# Altium PCB PCB1.PcbDoc (part 2 of 2)
Units mil, origin at the board's own origin, x right, y up, seen from the top; angles counter-clockwise.
Board outline 3937.01 x 3582.68 mil, 2 copper layers (Top Layer, Bottom Layer); 143 components, 102 nets, 475 pads, 464 vias.
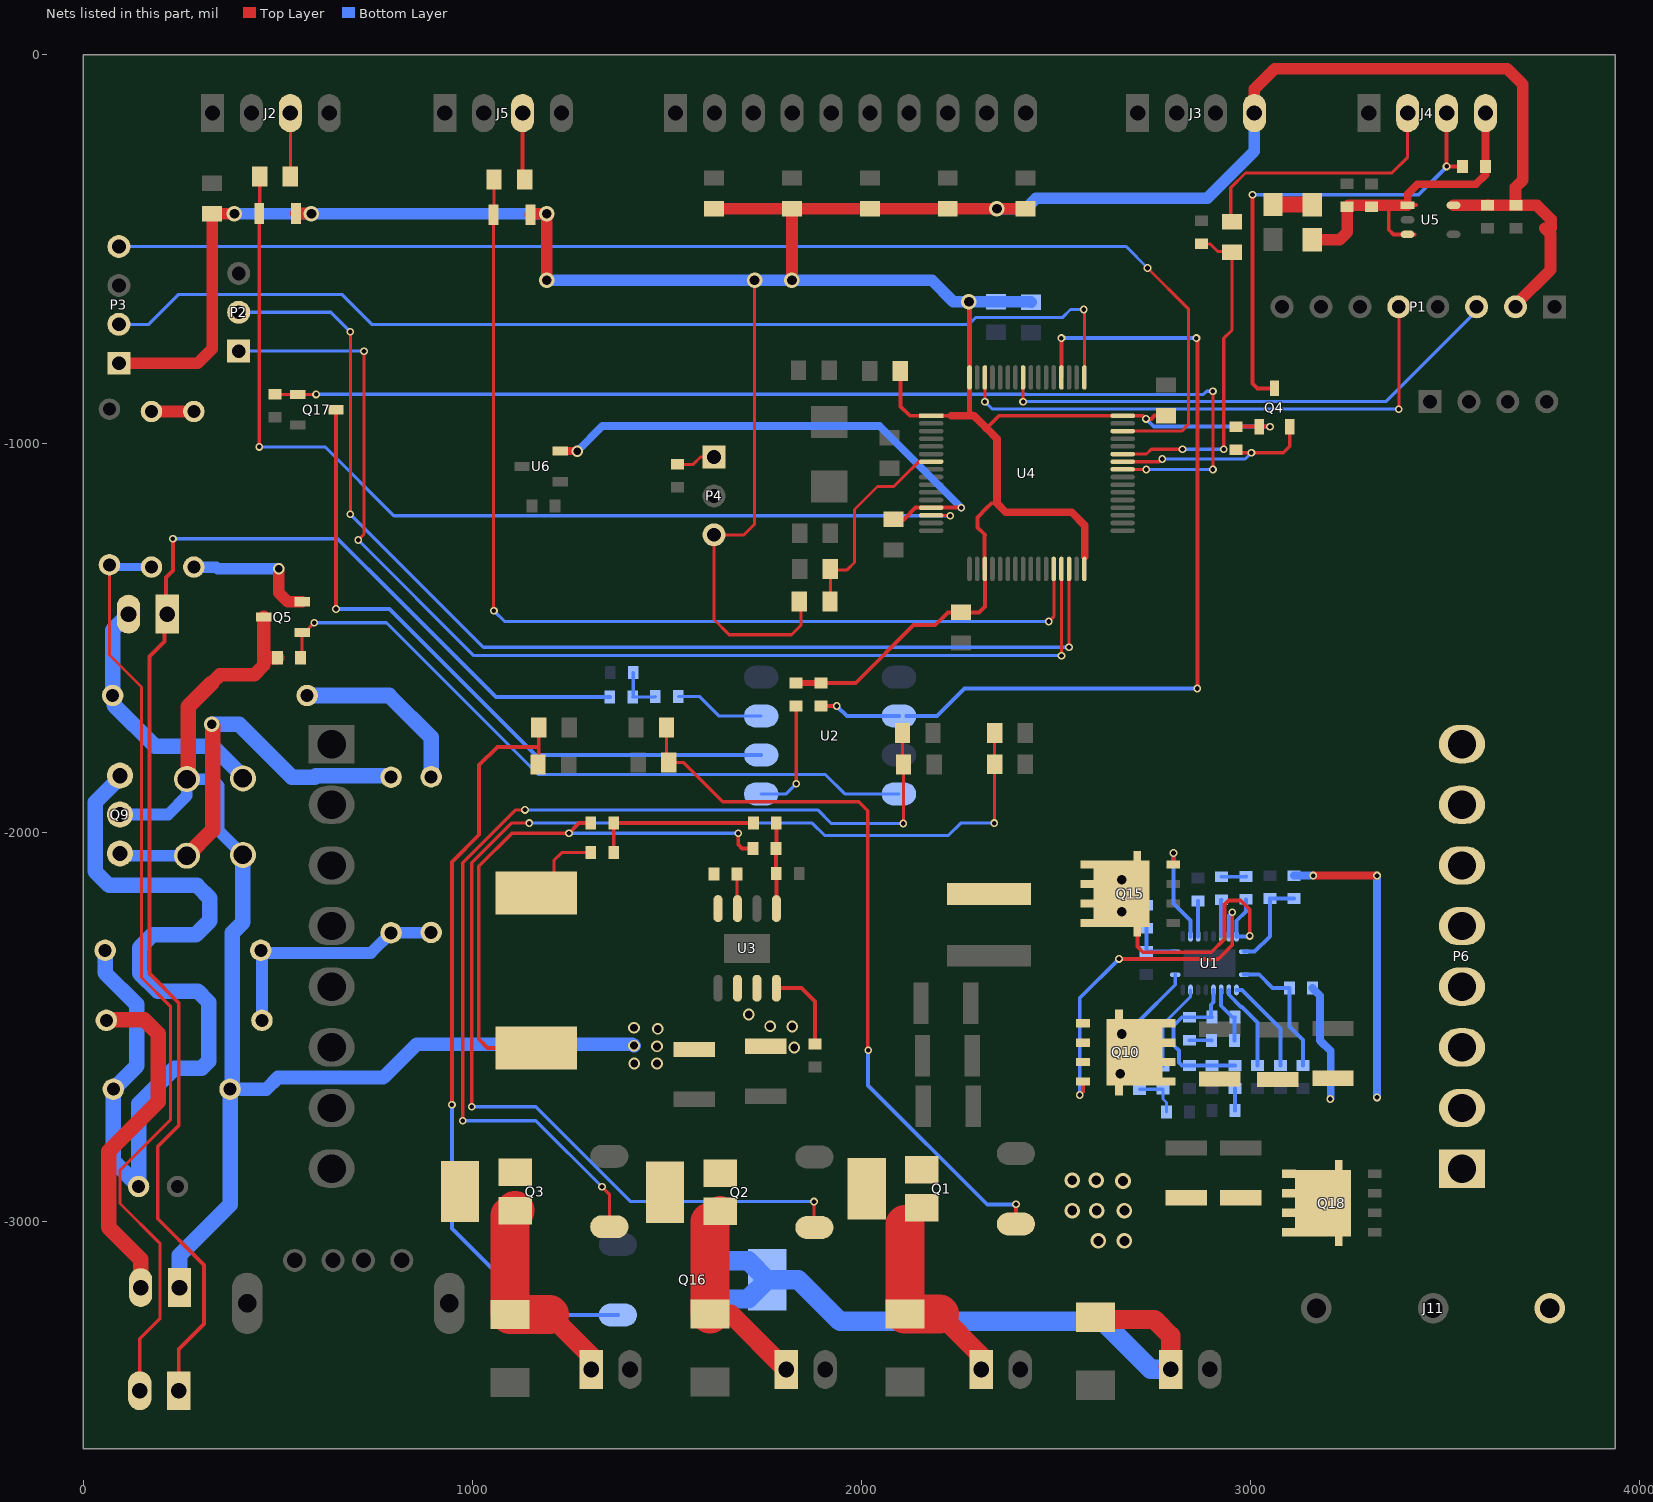
[diagram p2: the nets of this part, all layers, seen from the top]

## Via types
v1: diameter 20, hole 12, Top Layer to Bottom Layer, tented both sides, 399 vias
v2: diameter 40, hole 25, Top Layer to Bottom Layer, tented both sides, 46 vias
v3: diameter 30, hole 20, Top Layer to Bottom Layer, tented both sides, 18 vias
v4: diameter 59.06, hole 39.37, Top Layer to Bottom Layer, 1 vias

## Nets (pads, with @x,y where several pads share a name; then routed paths per layer and width w, separated by ;. In a path a pad name is that pad's centre, name@x,y a point inside that pad or via, vN(x,y) a via of type N, cw(c..) or ccw(c..) an arc to the next point about the centre after c; other vN are vias at no path point) (continued)
NetC3_2: C3.2 R15.2 U4.7 | length 538.3
  Top Layer w8: R15.2@1918.74,-1405 1919.74,-1404 C3.2@1919.74,-1322 1921.74,-1324 1963,-1324 1982,-1305 1982,-1169 2041,-1110 2083,-1110 2106.59,-1086.41 2146.89,-1046.11 U4.7@2179,-1046.11
NetC4_2: C4.2 U4.13 U6.2 | length 1330.8
  Top Layer w10: C4.2@2082,-1194.26 2108.74,-1194.26 2138.78,-1164.22 U4.13@2179,-1164.22 v1(2256,-1164.22)
  Top Layer w20: U6.2@1225.68,-1018.91 1268.91,-1018.91 v3(1269,-1019)
  Bottom Layer w20: v3(1269,-1019) 1334,-954 2045.78,-954 v1(2256,-1164.22)
NetC14_1: C14.1 C32.1 U1.4 | length 148.7
  Bottom Layer w10: U1.4@2924.3,-2403.9 2924.3,-2444.53 2953.77,-2474 C32.1@2959.77,-2474 2958.77,-2475 C14.1@2958.77,-2534
NetC14_2: C14.2 R29.2 | length 57.3
  Bottom Layer w10: R29.2@2842.77,-2533.06 2898.77,-2533.06 C14.2@2899.72,-2534
NetC16_1: C16.1 HUMID3.2 L2.2 | length 662.7
  Bottom Layer w40: L2.2@75,-1647 75,-1478.77 HUMID3.2@115.77,-1438 ; L2.2@78.84,-1647 78.84,-1672.07 183.77,-1777 331.77,-1777 409.77,-1855 C16.1@409.77,-1860
NetC17_1: C17.1 C46.2 L4.1 Q9.3 | length 2417.8
  Bottom Layer w30: Q9.3@93.77,-1858.23 Q9.3@93.77,-1853
  Bottom Layer w40: C46.2@55.77,-2302 55.77,-2360 136.77,-2441 136.77,-2599 C17.1@76.77,-2659 76.77,-2844 L4.1@141.77,-2909 141.77,-2697 233.77,-2605 303.77,-2605 321.77,-2587 321.77,-2435.13 293.64,-2407 190.77,-2407 144.77,-2361 144.77,-2295 177.77,-2262 288.77,-2262 324.77,-2226 324.77,-2168 291.77,-2135 66,-2135 30,-2099 30,-1922 Q9.3@93.77,-1858.23
NetC18_1: C18.1 U1.3 | length 226.3
  Bottom Layer w10: U1.3@2943.98,-2403.9 2943.98,-2416.21 2975.04,-2447.27 2977.69,-2447.27 3018.02,-2487.6 C18.1@3018.02,-2597.94
NetC23_1: C23.1 C46.1 R60.1 R61.1 | length 655.2
  Top Layer w30: C46.1@455.77,-2302 C46.1@462.69,-2308.91 ; R61.1@790.77,-2257 R61.1@791.77,-2256
  Bottom Layer w30: C23.1@455.77,-2479 C23.1@458.77,-2482 C46.1@458.77,-2305 ; C46.1@455.77,-2302 C46.1@458.77,-2305 ; R60.1@893.77,-2256 892.77,-2257 R61.1@790.77,-2257 738.86,-2308.91 462.69,-2308.91 C46.1@458.77,-2305
NetC23_2: C23.2 HUMID2.2 | length 888.3
  Top Layer w40: C23.2@58.77,-2482 59.77,-2481 156.77,-2481 192.77,-2517 192.77,-2691 64.77,-2819 64.77,-3014 146.77,-3096 HUMID2.2@146.77,-3169
NetC24_2: C24.2 Q9.1 R61.2 | length 1057.7
  Top Layer w40: C24.2@265.77,-2058.85 331.77,-1992.85 v2@331.77,-1723
  Bottom Layer w30: Q9.1@93.77,-2053 99.62,-2058.85 C24.2@265.77,-2058.85
  Bottom Layer w40: v2(329.77,-1721) 353,-1721 378.77,-1721 400,-1721 536,-1857 593.89,-1857 597.21,-1853.68 787.45,-1853.68 R61.2@790.77,-1857
  other v2: 329.77,-1721
NetC32_2: C32.2 C54.1 R29.1 R45.1 R65.2 U1.5 | length 429.2
  Bottom Layer w10: U1.5@2904.61,-2403.9 2904.61,-2435.16 2897.77,-2442 2897.77,-2471.06 C32.2@2900.72,-2474 R29.1@2842.77,-2474 2823.77,-2474 2801.77,-2496 2801.77,-2546 2815.77,-2560 2815.77,-2590 2823.77,-2598 2842.84,-2598 R45.1@2842.9,-2597.94 R65.2@2901.27,-2597.94 C54.1@2959.65,-2597.94
NetC38_1: C38.1 U3.7 | length 89.1
  Top Layer w8: C38.1@1680,-2106 1680,-2193.64 U3.7@1681,-2194.64
NetC38_2: C38.2 L5.1 R46.2 U3.8 | length 205.9
  Top Layer w8: L5.1@1164,-2155 1209,-2110 1209,-2071 1229,-2051 R46.2@1303.94,-2051
NetC40_1: C40.1 C53.1 R46.1 | length 435
  Top Layer w10: R46.1@1363,-2051 C53.1@1363,-1975 C40.1@1722,-1975
NetC40_2: C40.2 R43.1 R44.2 U3.5 | length 220.4
  Top Layer w10: U3.5@1781,-2194.64 R43.1@1781,-2104 1780.06,-2103.06 R44.2@1780.06,-2040 1781.06,-2039 C40.2@1781.06,-1975
NetC43_1: C43.1 R31.1 | length 63.4
  Bottom Layer w10: R31.1@2924.77,-2113 2986.77,-2113 C43.1@2987.77,-2112
NetC43_2: C43.2 L1.1 Q10.1 Q10.2 Q10.3 Q15.5 Q15.6 Q15.7 Q15.8 R27.1 U1.19 | length 747.4
  Top Layer w10: Q15.8@2708.85,-2235.36 2708.85,-2292.08 2723.77,-2307 2898.77,-2307 2932.77,-2273 2932.77,-2184 2942.77,-2174 2974.77,-2174 2997.77,-2197 v1(2997.77,-2265)
  Bottom Layer w10: v2(2668.5,-2202.83) 2685.33,-2186 R27.1@2732.77,-2186 ; C43.2@2987.77,-2171.06 2987.77,-2202 2963.67,-2226.1 U1.19@2963.67,-2266.1 2996.67,-2266.1 v1(2997.77,-2265)
  other v1: 2997.77,-2265
  other v2: 2668.5,-2120.41
NetC47_2: C47.2 R33.2 U1.20 | length 241.7
  Bottom Layer w10: U1.20@2983.35,-2305.47 3010.3,-2305.47 3049.77,-2266 C47.2@3049.77,-2169.06 R33.2@3111.77,-2169.06
NetC49_2: C49.2 R27.2 U1.11 | length 134.9
  Bottom Layer w10: R27.2@2732.77,-2245.06 2732.77,-2303.94 C49.2@2731.77,-2304.94 2732.3,-2305.47 U1.11@2806.19,-2305.47
NetC54_2: C54.2 R66.2 | length 57.1
  Bottom Layer w10: C54.2@2959.65,-2657 2959.83,-2657.18 R66.2@2959.83,-2714
NetC55_1: C55.1 R64.2 R73.2 | length 122.9
  Bottom Layer w8: R64.2@2714.77,-2659.06 R73.2@2775,-2659.06 2775,-2684 2784,-2693 C55.1@2784,-2718
NetFB1_2: FB1.2 FU2.1 | length 101.4
  Top Layer w40: FB1.2@3057.61,-385 3157.61,-385 FU2.1@3158.61,-386
NetHUMID1_1: HUMID1.1 HUMID3.1 R57.2 | length 3693.1
  Top Layer w10: v1(229.77,-1244) 229.77,-1326 211.77,-1344 211.77,-1434 HUMID3.1@215.77,-1438 208.77,-1445 208.77,-1508 170,-1546.77 170,-2362 245,-2437 245,-2752 191,-2806 191,-2992 300,-3101 ; HUMID1.1@244.77,-3434 244.77,-3328 309.77,-3263 309.77,-3110.77 300,-3101 ; 262,-3063 300,-3101
  Bottom Layer w10: v1(229.77,-1244) 598,-1244 653,-1244 807,-1398 812,-1403 1060,-1651 R57.2@1352.95,-1651
  other v1: 229.77,-1244
NetHUMID1_2: HUMID1.2 R25.2 R26.2 | length 2416.9
  Top Layer w8: R26.2@66.77,-1311 66.77,-1542.77 149,-1625 149,-2372 224,-2447 224,-2737 93.77,-2867.23 93.77,-2952.77 197,-3056 197,-3248 144.77,-3300.23 HUMID1.2@144.77,-3434
  Bottom Layer w8: R26.2@66.77,-1311 R26.2@72.77,-1317
  Bottom Layer w20: R26.2@72.77,-1317 R25.2@174.77,-1317
NetJ2_3: J2.3 R2.1 | length 163
  Top Layer w8: R2.1@531.77,-313 J2.3@531.77,-150
NetJ4_3: J4.3 Q4.3 R16.2 | length 1254.5
  Top Layer w10: v1(3005,-360) 3005,-845 3017.57,-857.57 Q4.3@3061.37,-857.57 ; J4.3@3503.77,-150 v1(3503.77,-287) R16.2@3544.72,-287
  Bottom Layer w10: v1(3005,-360) 3431.77,-360 v1@3504.77,-287
NetJ5_3: J5.3 R4.1 | length 173.2
  Top Layer w10: J5.3@1128.77,-150 1128.77,-315.77 R4.1@1134,-321
NetL2_1: L2.1 R60.2 | length 464.5
  Bottom Layer w40: L2.1@575,-1647 785.77,-1647 893.77,-1755 R60.2@893.77,-1856
NetP4_1: P4.1 R17.2 | length 102.9
  Top Layer w8: R17.2@1526.77,-1052.94 1567.05,-1052.94 1585.99,-1034 P4.1@1620.77,-1034 P4.1@1620.03,-1033.26
NetQ1_1: Q1.1 R1.2 R3.2 | length 1919.8
  Top Layer w8: R3.2@1498.74,-1834.74 R3.2@1499,-1835 ; R1.2@1498.74,-1729 1498.74,-1815 1501,-1817.26 R3.2@1501,-1819 ; R3.2@1504.74,-1819 1542,-1819 1643,-1920 1993,-1920 2016,-1943 2016,-2053
  Top Layer w10: 2016,-2053 2016,-2558 v1(2017,-2559) ; Q1.1@2396.83,-3005.55 v1@2396.83,-2955.06
  Bottom Layer w10: v1(2396.77,-2955) 2323,-2955 2017,-2649 v1@2017,-2560 ; v1@2017,-2560 v1(2017,-2559) 2016,-2559 v1@2017,-2560
NetQ2_1: Q2.1 R5.2 R6.2 | length 3318.9
  Top Layer w8: v1(998,-2704) 998,-2077 1100,-1975 v1(1146,-1975) ; v1(1877.77,-2948) 1877.77,-3013.49 Q2.1@1878.83,-3014.55 ; v1@2342.03,-1973.97 R6.2@2342.03,-1823.74 ; R6.2@2342.03,-1823 R6.2@2342.03,-1823.74 ; R5.2@2342.03,-1743 2342.03,-1822.26 2341.29,-1823 R6.2@2342.03,-1823.74
  Bottom Layer w8: v1(998,-2704) 1162.77,-2704 1406.77,-2948 v1(1877.77,-2948) ; v1(1146,-1975) 1873,-1975 1905,-2007 2223,-2007 2255,-1975 v1(2341,-1975)
NetQ3_1: Q3.1 R10.2 R11.2 | length 2755.4
  Top Layer w8: v1(975,-2740) 975,-2077 1111,-1941 v1(1135,-1941) ; v1(1332.77,-2910) 1351.83,-2929.06 Q3.1@1351.83,-3012.55 ; R10.2@2105.03,-1743 2105.03,-1821.74 R11.2@2108.03,-1824.74 ; v1(2107,-1976) 2108.03,-1974.97 R11.2@2108.03,-1824.74 ; 2108.03,-1940.97 R11.2@2108.03,-1824.74
  Bottom Layer w8: v1(975,-2740) 1162.77,-2740 v1(1332.77,-2910) ; v1(1135,-1941) 1887,-1941 1922,-1976 v1(2107,-1976)
NetQ5_1: Q5.1 R63.1 U2.8 | length 1793.4
  Top Layer w8: R63.1@558,-1550 562,-1546 Q5.1@562,-1485 568,-1485 v1(593,-1460)
  Bottom Layer w8: v1(593,-1460) 779,-1460 1151,-1832 1169,-1850 1907,-1850 1957,-1900 U2.8@2096.17,-1900
NetQ5_2: Q5.2 R24.2 | length 357.2
  Top Layer w30: v3(502.03,-1321.03) 502.03,-1383 525.29,-1406.26 Q5.2@562,-1406.26
  Bottom Layer w30: R24.2@287.77,-1321 R24.2@283.77,-1317 341,-1317 345.03,-1321.03 v3(502.03,-1321.03)
NetQ10_4: Q10.4 U1.18 | length 873.2
  Top Layer w10: v1(2560.77,-2674) 2569.17,-2665.6 Q10.4@2569.17,-2639.38 ; v1(2661.77,-2324) 2916.77,-2324 2952.77,-2288 v1(2952.77,-2204)
  Bottom Layer w10: v1(2560.77,-2674) 2560.77,-2425 v1(2661.77,-2324) ; U1.18@2943.98,-2266.1 2943.98,-2212.79
  other v1: 2560.77,-2674 2661.77,-2324 2952.77,-2204
NetQ15_4: Q15.4 U1.13 | length 262
  Top Layer w10: Q15.4@2801.37,-2081.62 2801.77,-2081.22 v1(2801.77,-2052)
  Bottom Layer w10: v1(2801.77,-2052) 2801.77,-2182 2845.56,-2225.79 U1.13@2845.56,-2266.1
  other v1: 2801.77,-2052
NetQ16_1: Q16.1 R52.2 R53.2 | length 2006.4
  Top Layer w10: v1(947,-2699) 947,-2075 1017,-2005 1017,-1826 1064,-1779 1169.03,-1779 ; R53.2@1168.26,-1824 1170.26,-1822 R52.2@1170.26,-1729
  Bottom Layer w10: v1(947,-2699) 947,-3017.23 1169.32,-3239.55 Q16.1@1373.71,-3239.55
NetQ17_3: Q17.3 U2.2 | length 1761.4
  Top Layer w10: Q17.3@648.77,-911.94 Q17.3@649.2,-912.37 v1(649.2,-1424.8) v1@649,-1425
  Bottom Layer w10: v1(649.2,-1424.8) 786.8,-1424.8 1162,-1800 U2.2@1741.83,-1800
NetR23_1: R23.1 U2.1 | length 300.9
  Top Layer w8: v1(1832,-1874) R23.1@1832,-1673.99
  Bottom Layer w8: U2.1@1741.83,-1900 1806,-1900 v1(1832,-1874)
NetR24_1: R24.1 R25.1 | length 109
  Top Layer w30: R25.1@174.77,-917 R24.1@283.77,-917
NetR31_2: R31.2 U1.17 | length 94.2
  Bottom Layer w10: U1.17@2924.3,-2266.1 2924.3,-2172.53 R31.2@2924.77,-2172.06
NetR32_1: R32.1 R68.2 U1.1 | length 344.1
  Bottom Layer w10: U1.1@2983.35,-2364.53 3022.3,-2364.53 3056.77,-2399 R32.1@3099.77,-2399 3099.77,-2498 3134.77,-2533 R68.2@3134.77,-2597.94
NetR47_2: R47.2 U3.4 | length 222.3
  Top Layer w10: U3.4@1781,-2399.36 1845.36,-2399.36 1880,-2434 R47.2@1880,-2542.94
NetR55_2: R55.2 R56.2 U4.43 | length 870.4
  Top Layer w8: U4.43@2671.13,-1026.43 2732.57,-1026.43 2745,-1014 v1(2825,-1014) v1@2826,-1015 ; R55.2@2874,-486.06 2895.71,-486.06 2915.39,-505.74 2950,-505.74 R56.2@2952,-507.74 ; v1(2931,-1014) 2931,-729 2952,-708 R56.2@2952,-507.74 ; R56.2@2950,-507.74 R56.2@2952,-507.74
  Bottom Layer w8: v1(2825,-1014) v1(2931,-1014)
NetR57_1: R57.1 R62.2 R69.2 | length 121.8
  Bottom Layer w8: R62.2@1413.06,-1588 1413.06,-1649.94 R57.1@1412,-1651 1468.95,-1651 R69.2@1469.95,-1650
NetR64_1: R64.1 U1.10 | length 273.3
  Bottom Layer w10: R64.1@2714.77,-2600 2714.77,-2482 2806.19,-2390.58 U1.10@2806.19,-2364.53
NetR67_2: R67.2 U1.2 | length 248.9
  Bottom Layer w10: U1.2@2963.67,-2403.9 2977.67,-2403.9 3076.4,-2502.62 R67.2@3076.4,-2597.94
NetR69_1: R69.1 U2.3 | length 233.5
  Bottom Layer w8: R69.1@1529,-1650 1584,-1650 1634,-1700 U2.3@1741.83,-1700
NetR73_1: R73.1 U1.8 | length 225.3
  Bottom Layer w8: R73.1@2775,-2600 2775,-2492 2845.56,-2421.44 U1.8@2845.56,-2403.9
OUT1: D1.A J1.1 Q1.2 | length 505.1
  Top Layer w50: 2199.87,-3237 2307.77,-3344.91 J1.1@2307.77,-3379.5
  Top Layer w100: 2111.74,-3007.18 D1.A@2111.74,-3237 2199.87,-3237
OUT2: D4.A J6.1 Q2.2 | length 529.8
  Top Layer w50: D4.A@1610.26,-3237 1663.77,-3237 J6.1@1806.27,-3379.5
  Top Layer w80: Q2.2@1610.26,-2999.66 Q2.2@1636.71,-2973.21
  Top Layer w100: D4.A@1610.26,-3237 Q2.2@1610.26,-2999.66
OUT3: D5.A J7.1 Q3.2 | length 559
  Top Layer w50: 1197.87,-3238 1304.77,-3344.91 J7.1@1304.77,-3379.5
  Top Layer w100: Q3.2@1109.71,-2971.21 1096.77,-2984.15 D5.A@1096.77,-3238 1197.87,-3238
OUT4: D6.A J9.1 Q16.2 | length 1769.7
  Top Layer w50: D6.A@2601.77,-3245 2607.77,-3251 2752.77,-3251 2794.77,-3293 J9.1@2794.77,-3379 J9.1@2787.77,-3372
  Bottom Layer w50: Q16.2@1615.84,-3198.21 1708.36,-3198.21 Q16.2@1757.57,-3149 ; Q16.2@1615.83,-3099.79 1708.36,-3099.79 Q16.2@1757.57,-3149 ; J9.1@2797.77,-3376 J9.1@2794.77,-3379 2743.77,-3379 2620.77,-3256 1944.77,-3256 1837.77,-3149 Q16.2@1757.57,-3149
PWM: Q17.1 R54.2 U4.41 | length 2847.2
  Top Layer w8: R54.2@492,-872.94 550.72,-872.94 Q17.1@550.77,-873 v1(598,-873) ; U4.41@2671.13,-1065.8 v1@2731.8,-1065.8 ; v1(2903,-1066) v1(2903,-865)
  Bottom Layer w8: v1(598,-873) 598.24,-872.76 2423.09,-872.76 2423.34,-873 2879,-873 2887,-865 v1(2903,-865) ; v1(2732,-1066) v1(2903,-1066)
  other v1: 2732,-1066 598,-873
RES: P1.5 U4.62 | length 1397.1
  Top Layer w8: v1@2316.8,-891.77 U4.62@2316.8,-829.57 ; v1(3381,-911) P1.5@3381,-648
  Bottom Layer w8: v1(2317,-891.98) 2335.78,-910.76 3380.76,-910.76 v1(3381,-911)
RX: J4.2 R56.1 | length 688.9
  Top Layer w8: R56.1@2952,-429 2949,-426 2949,-342 2987,-304 3363,-304 3403.77,-263.23 J4.2@3403.77,-150
RX3: P2.2 U4.30 | length 2967
  Top Layer w8: v1(686,-1181) v1(686,-712) ; v1(2533.33,-1523) U4.30@2533.33,-1321.7
  Bottom Layer w8: P2.2@399,-662 636,-662 v1(686,-712) ; v1(686,-1181) 1028,-1523 2512,-1523 v1(2533.33,-1523)
SCK: P1.3 U4.57 | length 1335.1
  Top Layer w8: v1@2415,-891.98 v1(2415.22,-891.76) U4.57@2415.22,-829.57
  Bottom Layer w8: v1(2415.22,-891.76) 3347.24,-891.76 3581,-658 P1.3@3581,-648
SW1: D2.A R2.2 U4.14 | length 2594.4
  Top Layer w8: v1(452,-1008) 451.77,-1007.77 D2.A@451.77,-408 453.03,-406.74 R2.2@453.03,-313 ; U4.14@2179,-1183.91 2226.91,-1183.91 v1(2228,-1185)
  Bottom Layer w8: v1(452,-1008) 620.97,-1008 797.97,-1185 1020,-1185 v1(2228,-1185)
SW2: D3.A R4.2 U4.28 | length 2715.6
  Top Layer w8: v1@1054,-1428 D3.A@1054,-411 ; 1054,-440 D3.A@1054,-411 ; R4.2@1055.26,-321 1055.26,-409.74 D3.A@1054,-411 ; v1(2481,-1457) 2495,-1443 2495,-1322.74 U4.28@2493.96,-1321.7
  Bottom Layer w8: v1(1055,-1429) 1083,-1457 v1(2481,-1457)
  other v1: 2481,-1457
SWCLK: P3.2 U4.49 | length 2734.8
  Top Layer w8: v1(2571,-655) 2572.7,-656.7 U4.49@2572.7,-829.57
  Bottom Layer w8: P3.2@91,-693 168,-693 245,-616 527,-616 664,-616 741,-693 742,-693 2276,-693 2294,-675 2517,-675 2537,-655 v1(2571,-655)
SWD: P3.4 U4.46 | length 3288.3
  Top Layer w8: U4.46@2671.13,-967.37 2822.63,-967.37 2840,-950 2840,-653 v1(2735,-548)
  Bottom Layer w8: P3.4@91,-493 2680,-493 v1(2735,-548)
  other v1: 2735,-548
TX: Q4.2 R18.2 U4.42 | length 528.6
  Top Layer w8: U4.42@2671.13,-1046.11 2765.89,-1046.11 ; R18.2@2963,-1015.06 2970.94,-1023 v1(3002,-1023) 3084,-1023 3100.74,-1006.26 Q4.2@3100.74,-956
  Bottom Layer w8: v1(2773,-1039) 2986,-1039 v1(3002,-1023)
TX3: P2.1 U4.29 | length 2968
  Top Layer w8: v1(706.17,-1247.17) 721,-1232.34 v1(721,-762) ; U4.29@2513.65,-1321.7 2514,-1322.06 v1(2514,-1545)
  Bottom Layer w8: P2.1@399,-762 v1(721,-762) ; v1(706.17,-1247.17) 1003.5,-1544.5 2483.5,-1544.5 2513.5,-1544.5 v1(2514,-1545)
VCC: C27.2 C28.1 FU2.2 J4.4 R16.1 U5.1 U5.3 | length 870.1
  Top Layer w10: 3355,-390.06 3355,-450 3366.8,-461.8 U5.3@3403.38,-461.8 3421.38,-461.8 ; U5.1@3415.82,-386 3425.38,-386
  Top Layer w20: U5.1@3403.38,-387 3404,-386.38 3404,-358 3429,-333 3579,-333 3603.77,-308.23 R16.1@3603.77,-287 J4.4@3603.77,-150
  Top Layer w30: FU2.2@3158.61,-476 3229,-476 3248.61,-456.39 3248.61,-392 C28.1@3247.61,-391 3251.61,-387 U5.1@3403.38,-387 U5.1@3403.32,-387.06
VCC_3.3V: C5.2 C6.2 C7.2 C26.2 C56.1 D2.K D3.K J3.4 P1.2 P3.1 P4.3 Q4.1 R7.2 R8.2 R9.2 R12.1 R13.1 R15.1 R18.1 R22.2 R23.2 R58.2 R59.1 R70.2 U4.1 U4.19 U4.32 U4.48 U4.64 U5.5 | length 10654.8
  Top Layer w8: v2(1725,-580) 1725,-1207 1698,-1234 P4.3@1620.77,-1234 1620.77,-1451.77 1660,-1491 1820,-1491 1844,-1467 1844,-1409 R15.1@1840,-1405
  Top Layer w10: R23.2@1828.06,-1610.99 R23.2@1832,-1614.93 ; R70.2@1896,-1614.93 1985.07,-1614.93 2134,-1466 2189.28,-1466 2222.02,-1433.26 C6.2@2256,-1433.26 2301.74,-1433.26 2316.8,-1418.2 U4.19@2316.8,-1321.7 ; C5.2@2099.74,-813 2099.74,-903.74 2124,-928 U4.1@2179,-928 2231,-928 ; U4.19@2316.48,-1321.39 U4.19@2316.8,-1321.7 ; 2321.5,-960.5 2321,-960 2353,-928 U4.48@2671.13,-928 2723,-928 v1(2731,-936) 2745,-936 2753.26,-927.74 C7.2@2783,-927.74 C7.2@2782.74,-928 ; 2348,-1153 2334,-1153 2322.78,-1164.22 2298,-1189 2298,-1215 2316.8,-1233.8 2316.8,-1235.12 2316,-1235.92 2316,-1320.91 U4.19@2316.8,-1321.7 ; R18.1@2963,-956 Q4.1@3022,-956 v1(3050,-956)
  Top Layer w12: v2@2278,-635 2277.43,-635.57 U4.64@2277.43,-829.57 2277.43,-916.43 2289,-928
  Top Layer w15: R23.2@1832,-1614.93 R70.2@1896,-1614.93
  Top Layer w20: 2231,-928 2289,-928 2308.5,-947.5 ; 2301.28,-940.28 2308.5,-947.5 ; 2321,-960 2308.5,-947.5 ; 2321.5,-960.5 2348,-987 2348,-1153 2371,-1176 2540,-1176 2573.92,-1209.92 2573.92,-1290
  Top Layer w30: P3.1@91,-793 294,-793 330.77,-756.23 R22.2@330.77,-408.74 387.74,-408.74 v2(388,-409) ; D2.K@546.26,-408 579,-408 v2@580,-409 ; D3.K@1148.49,-411 1150.49,-409 v2(1191,-409) v2(1191,-580) ; R9.2@1620.77,-395.74 R8.2@1821.02,-395.74 ; v2(1821.02,-579.98) R8.2@1821.02,-395.74 ; R58.2@2421.77,-395.74 R59.1@2221.52,-395.74 R7.2@2021.27,-395.74 R8.2@1821.02,-395.74 ; J3.4@3009.77,-150 3009.77,-88.23 3062,-36 3659.83,-36 3699.83,-76 3699.83,-322.17 3681,-341 C56.1@3681,-386.94 ; U5.5@3521.49,-387 3609.32,-387 C26.2@3610.38,-385.94 ; C26.2@3609.38,-386.94 C56.1@3681.61,-386.94 ; P1.2@3681,-643 3771,-553 3771,-461 3756,-446 ; C56.1@3682,-386.55 C56.1@3681.61,-386.94 ; 3772,-446 3772,-422.94 3736,-386.94 C56.1@3681.61,-386.94
  Bottom Layer w10: v1(2731,-936) 2751,-956 v1(3050,-956)
  Bottom Layer w12: P4.3@1615.77,-1229 P4.3@1620.77,-1234
  Bottom Layer w30: v2(388,-409) v2(586,-409) v2(1191,-409) ; v2(1191,-580) 2181,-580 2236,-635 v2(2276,-635) R13.1@2346,-635 2435,-635 R12.1@2436,-636 ; v2(2348,-395.74) 2421.77,-395.74 2448.51,-369 2889,-369 3009.77,-248.23 J3.4@3009.77,-150
  other v2: 1725,-580 1821.02,-579.98 2348,-395.74
VCC_12_24: J11.3 P6.5 P6.6 P6.7 P6.8
VCC_24V: C16.2 C17.2 C24.1 C41.1 C53.2 HUMID2.1 L5.2 Q5.3 Q9.2 R44.1 R63.2 | length 4858.2
  Top Layer w10: L5.2@1164,-2552.64 1038.64,-2552.64 1016,-2530 1016,-2086 1101,-2001 v1(1248,-2001) 1274,-1975 C53.2@1303.94,-1975 ; v1(1683,-2001) 1683,-2030 1693,-2040 R44.1@1721,-2040
  Top Layer w35: 329.39,-1615.39 350.77,-1594 439,-1594 463.57,-1569.43 463.57,-1549 ; Q5.3@463.57,-1445.63 463.57,-1549 ; R63.2@498.94,-1550 464.57,-1550 463.57,-1549
  Top Layer w40: C24.1@265.77,-1862 268.77,-1859 268.77,-1736 ; 268.77,-1710 268.77,-1736 ; 329.39,-1615.39 268.77,-1676 268.77,-1736
  Bottom Layer w10: v1(1248,-2001) v1(1683,-2001)
  Bottom Layer w30: Q9.2@93.77,-1953 217.77,-1953 265.77,-1905 C24.1@265.77,-1862 ; C24.1@259.77,-1868 C24.1@265.77,-1862 ; C16.2@409.77,-2056.85 347.77,-1994.85 347.77,-1879 330.77,-1862 C24.1@265.77,-1862
  Bottom Layer w35: C17.2@376.77,-2659 470,-2659 500,-2629 771,-2629 857,-2543 1411,-2543 v3(1415,-2547)
  Bottom Layer w40: HUMID2.1@246.77,-3169 246.77,-3086 376.77,-2956 C17.2@376.77,-2659 C17.2@382.77,-2653 ; C17.2@383.77,-2652 C17.2@382.77,-2653 ; C16.2@409.77,-2056.85 409.77,-2149 409.77,-2230 382.77,-2257 C17.2@382.77,-2653
  other v3: 1416,-2593 1474,-2593 1474,-2549 1476,-2504 1415,-2501
VCC_L2: C13.1 U1.14 | length 91.3
  Bottom Layer w10: C13.1@2864.77,-2175 2864.77,-2265.63 U1.14@2865.24,-2266.1
VIN: C8.1 C9.1 C10.1 C19.1 C20.1 C42.1 P6.1 P6.2 P6.3 P6.4 Q10.5 Q10.6 Q10.7 Q10.8 Q18.5 Q18.6 Q18.7 Q18.8 R32.2 R33.1 U3.2 U3.3 | length 1098.4
  Top Layer w20: v1(3160.77,-2110) v1(3324.77,-2110)
  Bottom Layer w20: R33.1@3111.77,-2110 v1(3160.77,-2110) ; R32.2@3158.83,-2399 3178.51,-2418.69 3178.51,-2452 ; 3178.51,-2440 3178.51,-2452 ; v1@3205.77,-2683 3205.77,-2561 3178.51,-2533.74 3178.51,-2452 ; v1(3324.77,-2680) v1(3324.77,-2110)
  other v1: 3204.77,-2684
  other v2: 2608.77,-3049 2675.77,-3049 2541.77,-2971 2604.77,-2971 2675.77,-2971 2672,-2895 2541.77,-2893 2603.27,-2893 2664.77,-2619 2668.77,-2517
  other v3: 1827,-2552 1822,-2498 1765,-2497 1710,-2467
WATER_ADC: R70.1 U2.6 U4.52 | length 2335.8
  Top Layer w10: R70.1@1896,-1673.99 v1(1936.18,-1673.99) ; U4.52@2513.65,-829.57 v1(2513.65,-728.35) ; v1(2860.65,-728.35) 2863,-730.71 v1(2863,-1629)
  Bottom Layer w10: v1@1937.19,-1675 1962.19,-1700 U2.6@2096.17,-1700 ; U2.6@2116,-1700 2194,-1700 2265,-1629 v1(2863,-1629) ; v1(2513.65,-728.35) v1(2860.65,-728.35)
pads on no net: J5.1 U1.7 U3.6 U4.10 U4.11 U4.25 U4.37 U4.38 U4.39 U4.40 U4.44 U4.45 U4.50 U4.51 U4.54 USB1.2 USB1.3 USB1.6
copper on no net:
  other v1: 2278,-2030

## Polygon pours and split planes (outlines as drawn)
GND on Top Layer "Top Layer-No Net" (solid, remove dead copper, pour order 1001): -195.06,389.27 3960.94,389.27 3994.94,423.27 4056.94,361.27 4056.94,-3649.73 4043.94,-3649.73 3905.94,-3787.73 3877.94,-3759.73 -126.06,-3759.73 -126.06,-3472.73 -250.06,-3348.73 -92.06,-3190.73 -92.06,430.27
+5V on Top Layer "Top Layer-No Net" (solid, remove dead copper, pour order 1000): 646.06,-1687.89 1085.86,-1687.89 1110.81,-1687.89 1123.67,-1693.69 1150,-1705.55 1150,-1882.06 1150,-1977.02 1117.93,-1991.47 1099.6,-1999.73 870.53,-1999.73 739.97,-1999.73 726.22,-2005.92 721.64,-2007.99 721.64,-2043.08 721.64,-3049.49 737.67,-3056.72 774.33,-3056.72 797.23,-3056.72 806.4,-3060.84 822.43,-3068.07 822.43,-3093.88 822.43,-3176.45 788.07,-3191.94 783.49,-3194 668.95,-3194 597.94,-3194 554.42,-3174.39 362,-3087.68 362,-1727.23 362,-1725.16 407.81,-1704.52 444.72,-1687.89 646.06,-1687.89
GND on Bottom Layer "Top Layer-No Net" (solid, remove dead copper, pour order 1002): -158.57,370.06 3997.43,370.06 4031.43,404.06 4093.43,342.06 4093.43,-3668.94 4080.43,-3668.94 3942.43,-3806.94 3914.43,-3778.94 -89.57,-3778.94 -89.57,-3491.94 -213.57,-3367.94 -55.57,-3209.94 -55.57,411.06

## Keep-outs
Keep-Out Layer:
  the board outline again, w10

## Other copper
Top Layer:
  rectangle net GND: 1618,-2334 1810,-2255
  rectangle net VCC_24V: 1045,-2615 1629.06,-2484
  rectangle net VCC_12_24: 3677.77,-3299 3920.77,-2001
  rectangle net VCC_12_24: 3416.77,-2296 3918.77,-1674
  rectangle net OUT2: 1440.77,-3008 1681.77,-2834
  rectangle net OUT3: 911.77,-3000.93 1168.02,-2830
  rectangle net OUT1: 1964.77,-3002 2200.77,-2828
  pour cut-out: 469.77,-1686 469.77,-1992 356.77,-1992 356.77,-1686
  pour cut-out: 506.77,-2417.15 518.77,-2429.15 518.77,-2511.15 495.77,-2534.15 418.77,-2534.15 405.77,-2521.15 405.77,-2417.15
  pour cut-out: 343,-2611 411,-2611 424,-2624 424,-2686 406,-2704 343,-2704 333,-2694 333,-2618 336,-2618
  pour cut-out: 422,-2254 490,-2254 503,-2267 503,-2329 485,-2347 422,-2347 412,-2337 412,-2261 415,-2261
  pour cut-out: 469.77,-1992 469.77,-2086 446.77,-2109 356.77,-2109 356.77,-1992
  region net +12V: 2437.77,-2272 2452.77,-2287 2452.77,-2759 2443.77,-2768 2304.77,-2768 2304.77,-3090 2513.77,-3299 2513.77,-3382 2492.77,-3403 2379.77,-3403 2361.77,-3385 2361.77,-3264 2228.77,-3131 2228.77,-2367 2201.77,-2367 2193.77,-2359 2193.77,-2277 2198.77,-2272
  region net NetC43_2: 2598.77,-2610 2607.77,-2601 2607.77,-2292 2619.77,-2280 2743.77,-2280 2754.77,-2269 2754.77,-2042 2741.77,-2029 2545.77,-2029 2516.77,-2058 2207.77,-2058 2188.77,-2077 2188.77,-2183 2202.77,-2197 2471.77,-2197 2471.77,-2605 2476.77,-2610
  region net VIN: 3258.77,-3080 3258.77,-2830 3267.77,-2821 3427.77,-2821 3434.77,-2828 3434.77,-2941 3446.77,-2949 3626.77,-2949 3626.77,-2319 3387.77,-2319 3371.77,-2335 3371.77,-2547 3352.77,-2566 2854.77,-2566 2845.77,-2557 2845.77,-2455 2828.77,-2438 2637.77,-2438 2626.77,-2449 2626.77,-2689 2663.77,-2726 3048.77,-2726 3048.77,-2881 2749.77,-2881 2713.77,-2845 2493.77,-2845 2475.77,-2863 2475.77,-3080
  region net +48V: 3412.77,-3304 3412.77,-2904 3275.77,-2904 3276.1,-3151 3102,-3151 3102,-3304
  region net NetC38_2: 1277,-2091 1328,-2142 1585,-2142 1592,-2135 1592,-2082 1597,-2077 1633.65,-2077 1644,-2087.35 1644,-2225 1638,-2231 1617,-2231 1605,-2219 1322,-2219 1312,-2229 1050,-2229 1037,-2216 1037,-2099 1045,-2091
  region net VIN: 1738,-2363 1744,-2369 1744,-2480 1745,-2481 1834,-2481 1841,-2488 1841,-2575 1834,-2582 1693,-2582 1681,-2570 1681,-2485 1664,-2468 1664,-2365 1666,-2363
  pour cut-out: -4,-1372 162,-1372 162,-1627 182,-1647 429,-1647 518.35,-1736.35 518.35,-2912.65 333,-3098 333,-3578 328,-3583 322,-3577 -17,-3577 -17,-1385
Bottom Layer:
  rectangle net VCC_24V: 1359,-2612 1509,-2482
  rectangle net VIN: 2506,-3072 2700,-2857
  rectangle net VIN: 3447.77,-2935 3631.77,-2328
  rectangle net VCC_12_24: 3676.77,-3305 3922.77,-2255
  rectangle net VCC_12_24: 3422.77,-2296 3923.77,-1675
  pour cut-out: 496,-2434 428,-2434 415,-2447 415,-2509 433,-2527 496,-2527 506,-2517 506,-2441 503,-2441
  pour cut-out: -4,-1372 162,-1372 162,-1627 182,-1647 429,-1647 518.35,-1736.35 518.35,-2912.65 333,-3098 333,-3578 328,-3583 322,-3577 -17,-3577 -17,-1385
  pour cut-out: 457.77,-1992 469.77,-2004 469.77,-2086 446.77,-2109 369.77,-2109 356.77,-2096 356.77,-1992
  region net VIN: 1670,-2436 1838,-2436 1858,-2456 1858,-2723 2135,-3000 2428,-3000 2460,-2968 2524,-2968 2524,-3064 2515,-3073 2067,-3073 1659,-2665 1659,-2447
  region net +48V: 3412.77,-3304 3412.77,-2904 3275.77,-2904 3276.1,-3151 3102,-3151 3102,-3304

## Silkscreen, mask and mechanical layers (free items; w line width, h text height)
Top Overlay:
  lines w5: 513.78,-1687.89 513.78,-2959.89 514.79,-2960.9 ; 3151,-698 3151,-745 3188,-745 3188,-698 ; 3480,-841.76 3480,-794.76 3517,-794.76 3517,-841.76 ; 3665.32,-1687 3667.32,-1689 ; 3684,-698 3684,-745 3721,-745 3721,-698 ; 3692,-841.76 3692,-794.76 3729,-794.76 3729,-841.76
  text "串口" at 3393.77,126 h50
  text "目标温度、环境温度、压缩机排气温度、目标送风温度、水温度" at 1414.77,89 h50
  text "iic湿度" at 2792.77,82 h50
  text "湿度" at 391.77,71 h50
  text "-  SW2" at 1024,-66 h50
  text "5V" at 1210,-66 h50
  text "-     A1     -      A2     -     A3     -      A4    -      A5" at 1508,-68 h50
  text "-     SCL  SDA   3.3V" at 2656,-72 h50
  text "-     RX    TX    5V" at 3267,-73 h50
  text "A6     -     SW1    5V" at 293,-75 h50
  text "SWD" at 157,-501 h50
  text "GND" at 477,-563 h50
  text "GND" at 164,-605 h50
  text "RX3" at 488,-675 h50
  text "SWCLK" at 166,-699 h50
  text "TX3" at 489,-770 h50
  text "3.3V" at 171,-809 h50
  text "+ -" at 2919.77,-3489 h60 r180
  text "+ -" at 1933.77,-3504.1 h60 r180
  text "12V" at 3723,-3511 h50
  text "+ -" at 2442.77,-3514 h60 r180
  text "+ -" at 1433.77,-3517 h60 r180
  text "-" at 3447,-3519 h50
  text "48V" at 3128,-3520 h50
  text "SW1 SW2" at 61.77,-3553 h40
  text "水泵" at 1327.77,-3645 h50
  text "冷风" at 1841.77,-3647 h50
  text "电磁阀" at 2784.77,-3647 h50
  text "水位开关2" at 92.77,-3648 h50
  text "热风" at 2333.77,-3654 h50
Bottom Overlay:
  text "OUT" at 1532.77,-1035 h50
  text "GND" at 1531.77,-1146 h50
  text "3.3V" at 1539.77,-1262 h50
Top Solder:
  rectangle: 3681.77,-2882 3920.77,-1674.41
Bottom Solder:
  rectangle: 3678.77,-2955 3924.77,-1679
Mechanical 1:
  the board outline again, w10

## Text inside footprints (layer, text, board x,y; h text height)
Q1: Top Overlay "1" at 2249.2,-2993.74 h43.31 r90; Top Overlay "3" at 2249.2,-2857.91 h43.31 r90
Q2: Top Overlay "1" at 1731.2,-3002.74 h43.31 r90; Top Overlay "3" at 1731.2,-2866.91 h43.31 r90
Q3: Top Overlay "1" at 1204.2,-3000.74 h43.31 r90; Top Overlay "3" at 1204.2,-2864.91 h43.31 r90
Q16: Bottom Overlay "1" at 1521.35,-3227.74 h43.31 r270; Bottom Overlay "3" at 1521.35,-3091.91 h43.31 r270